# Altium PCB pechatka.PcbDoc
Units mm, origin at the board's own origin, x right, y up, seen from the top; angles counter-clockwise.
Board outline 95 x 95 mm, 2 copper layers (Top Layer, Bottom Layer); 116 components, 77 nets, 390 pads, 0 vias.
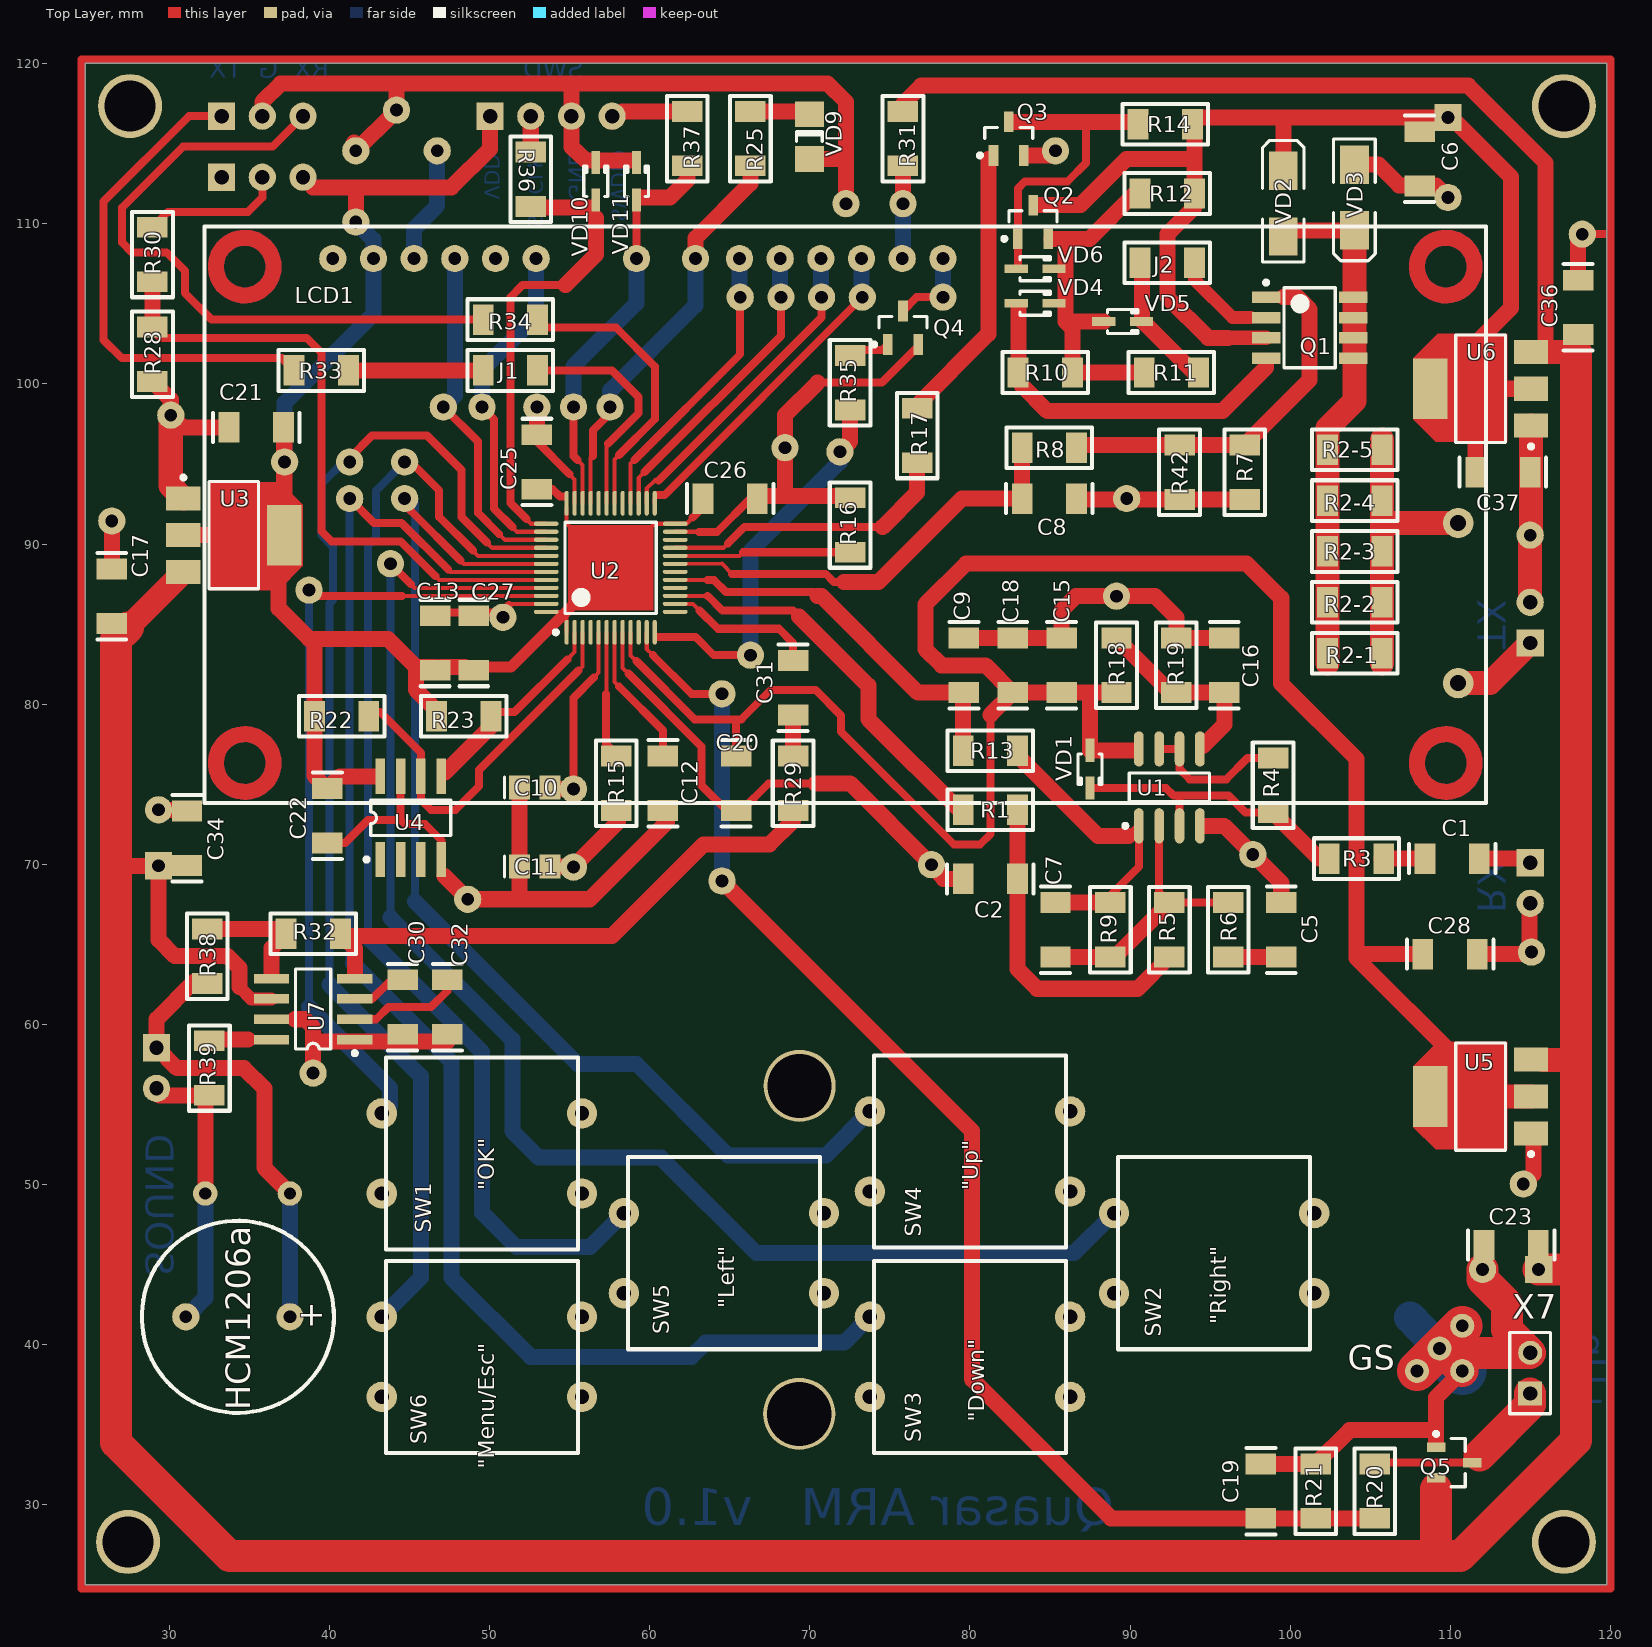
[diagram p0: Top Layer view]
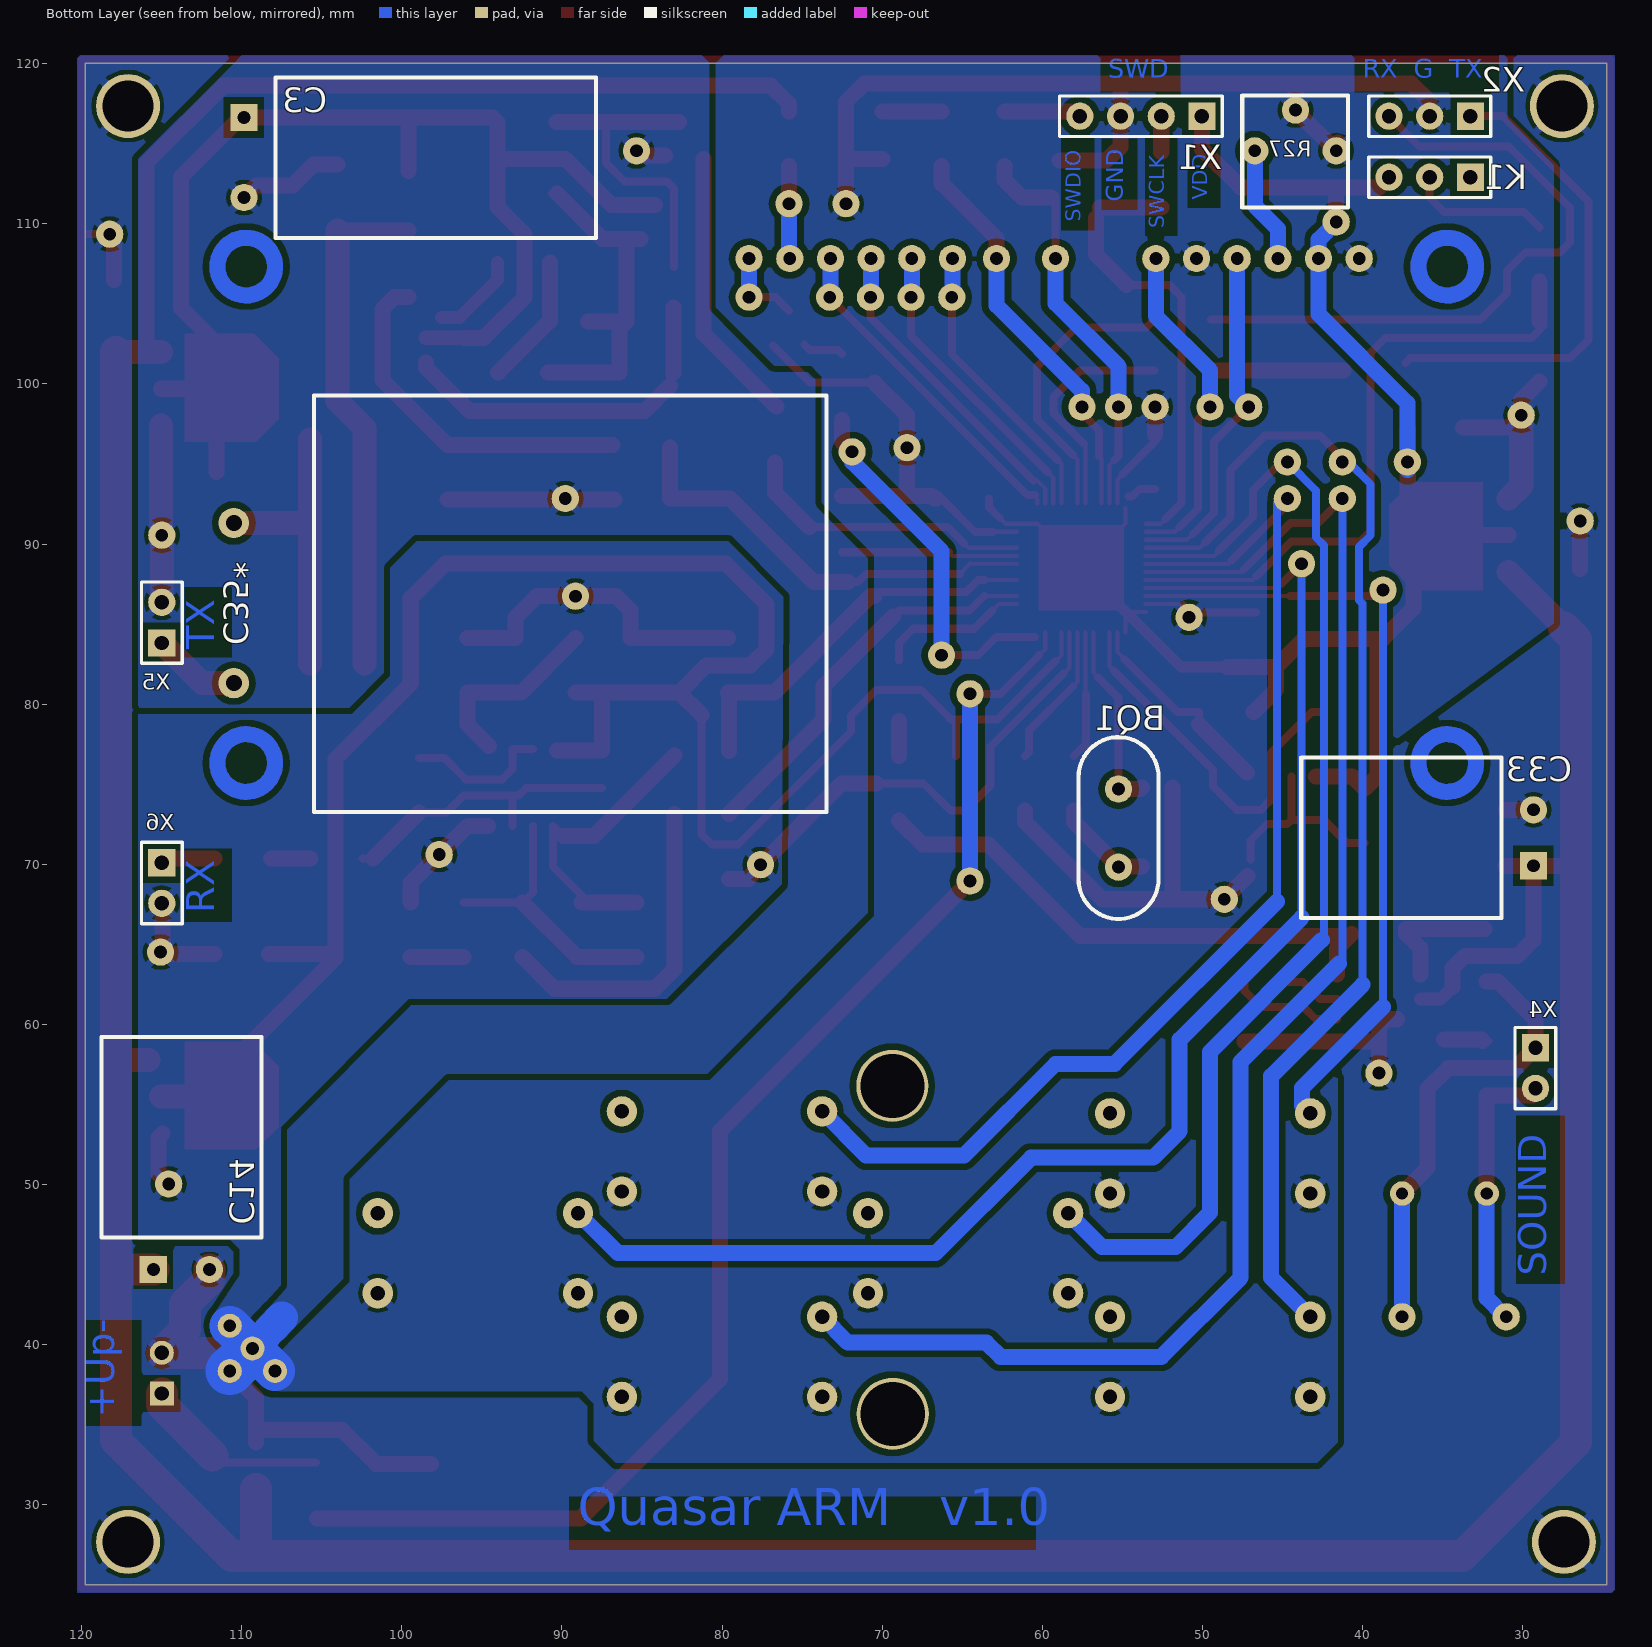
[diagram p1: Bottom Layer view, seen from below]

## Layer stack, top to bottom
Top Solder: solder mask 0.0102, Solder Resist, Dk 3.5
Top Layer: signal copper 0.0356
Dielectric 1: dielectric 0.32, FR-4, Dk 4.8
Bottom Layer: signal copper 0.0356
Bottom Solder: solder mask 0.0102, Solder Resist, Dk 3.5

## Board outline
24.765,25.019 119.765,25.019 119.765,120.019 24.765,120.019

## Design rules (kind name [scope] priority, off if disabled: settings)
Clearance Clearance_TEXT [InPolygon vs IsTextInverted] p1: gap=0
Clearance [All] p2: gap=0.4
PlaneConnect [All] p1: planeconnectstyle=Relief reliefexpansion=0.508 reliefentries=4 reliefconductorwidth=0.5 reliefairgap=0.254
PolygonConnect [All] p1: connectstyle=Relief reliefconductorwidth=0.5 reliefentries=4 polygonreliefangle="45 Angle" airgapwidth=0.254
RoomDefinition Keyboard_on_board [InComponentClass('Keyboard_on_board')] p1: confinementstyle=ConfineIn formatcopy=TRUE lockcomponents=FALSE outline 41.908,32.004 103.378,32.004 103.378,59.182 41.908,59.182
RoomDefinition Transmitter [InComponentClass('Transmitter')] p2: confinementstyle=ConfineIn formatcopy=TRUE lockcomponents=FALSE outline 61.214,119.761 61.214,65.532 116.586,65.532 116.586,119.761
RoomDefinition SoundBlock [InComponentClass('SoundBlock')] p3: confinementstyle=ConfineIn formatcopy=TRUE lockcomponents=FALSE outline 72.263,53.848 72.263,84.074 27.305,84.074 27.305,53.848
RoomDefinition ReceiverBlock [InComponentClass('ReceiverBlock')] p4: confinementstyle=ConfineIn formatcopy=TRUE lockcomponents=FALSE outline 69.596,53.467 119.761,53.467 119.761,91.44 69.596,91.44
RoomDefinition "Power block" [InComponentClass('Power block')] p5: confinementstyle=ConfineIn formatcopy=TRUE lockcomponents=FALSE outline 24.917,25.146 119.634,25.146 119.634,119.888 24.917,119.888
RoomDefinition "Microcontroller block" [InComponentClass('Microcontroller block')] p6: confinementstyle=ConfineIn formatcopy=TRUE lockcomponents=FALSE outline 25.4,25.273 119.507,25.273 119.507,119.38 25.4,119.38
RoutingVias [All] p1: holewidth=0.8 width=1.4 viastyle="Through Hole" minholewidth=0.8 minwidth=1.4 maxholewidth=0.8 maxwidth=1.4
SolderMaskExpansion [All] p1: expansion=0.102
Width Net_UP [InNetClass('UP')] p1: maxlimit=1.5 minlimit=0.5 preferedwidth=1.5
Width Net_5V [InNetClass('5V')] p2: maxlimit=1.5 minlimit=0.5 preferedwidth=1
Width Net_VDD [InNetClass('VDD')] p3: maxlimit=1.5 minlimit=0.5 preferedwidth=1
Width Net_VDDA [InNetClass('VDDA')] p4: maxlimit=1 minlimit=0.5 preferedwidth=1
Width [All] p5: maxlimit=3 minlimit=0.254 preferedwidth=0.5
29 further rules are at their usual default settings.

## Classes and differential pairs
component class Keyboard_on_board: SW1 SW2 SW3 SW4 SW5 SW6
component class ReceiverBlock: C1 C2 C5 C7 C9 C15 C16 R1 R3 R4 R5 R6 R9 R13 R18 R19 U1 VD1 X6
component class Transmitter: C3 C6 C8 C35* Q1 Q2 Q3 R2-1 R2-2 R2-3 R2-4 R2-5 R7 R8 R10 R11 R12 R14 R17 R42 VD2 VD3 VD4 VD5 VD6 X5
component class SoundBlock: C30 C31 C32 C33 C34 R29 R32 R38 R39 U7 X4
component class "Microcontroller block": BQ1 C10 C11 C12 C13 K1 LCD1 Q4 R15 R16 R22 R23 R25 R27 R28 R30 R31 R33 R34 R35 R36 R37 U2 U4 VD9 VD10 VD11 X1 X2
component class "Power block": C14 C17 C18 C19 C20 C21 C22 C23 C25 C26 C27 C28 C36 C37 GS Q5 R20 R21 U3 U5 U6 X7

## Components (designator, comment, footprint, x,y, rotation, side; value= is the part's Value field where it differs from the comment)
BQ1 "8,0 MHz" "HC-49/U3H (low profile)" 55.245,72.263 r90 bottom
C1 "0.1uF" 1206_SMD_CAPACITOR 110.109,70.358 r180 top
C2 "4700" 1206_SMD_CAPACITOR 81.28,69.088 r0 top
C3 "1000.0uF" Capacitor-10X20-LYINGR 109.855,111.633 r270 bottom
C5 "0.033" 1206_SMD_CAPACITOR 99.441,65.913 r90 top
C6 "0.1uF" 1206_SMD_CAPACITOR 108.077,114.046 r270 top
C7 "22pF" 1206_SMD_CAPACITOR 85.344,65.913 r270 top
C8 "4.7uF" 1206_SMD_CAPACITOR 84.963,92.837 r180 top
C9 "4700" 1206_SMD_CAPACITOR 79.629,82.423 r270 top
C10 "22pF" 0805 52.832,74.803 r0 top
C11 "22pF" 0805 52.832,69.85 r0 top
C12 "0.1uF" 1206_SMD_CAPACITOR 60.833,75.057 r90 top
C13 "0.1uF" 1206_SMD_CAPACITOR 46.609,83.82 r270 top
C14 "470.0uF" Capacitor-10x12.5-lyingR 112.014,44.704 r180 bottom
C15 "1.0uF" 1206_SMD_CAPACITOR 85.725,82.423 r90 top
C16 "10uF" 1206_SMD_CAPACITOR 95.885,82.423 r270 top
C17 "0.1uF" 1206_SMD_CAPACITOR 26.416,86.741 r270 top
C18 "0.1uF" 1206_SMD_CAPACITOR 82.677,82.423 r270 top
C19 "0.1uF" 1206_SMD_CAPACITOR 98.171,30.861 r270 top
C20 "0.1uF" 1206_SMD_CAPACITOR 65.405,75.057 r90 top
C21 "10uF" 1206_SMD_CAPACITOR 35.433,97.282 r0 top
C22 "0.1uF" 1206_SMD_CAPACITOR 39.878,73.025 r90 top
C23 "0.1uF" 1206_SMD_CAPACITOR 113.792,46.228 r0 top
C25 "0.1uF" 1206_SMD_CAPACITOR 52.959,95.123 r270 top
C26 "0.1uF" 1206_SMD_CAPACITOR 65.024,92.837 r180 top
C27 "10uF" 1206_SMD_CAPACITOR 49.022,83.82 r270 top
C28 "10uF" 1206_SMD_CAPACITOR 109.982,64.389 r180 top
C30 "1uF" 1206_SMD_CAPACITOR 44.577,61.087 r90 top
C31 "10uF" 1206_SMD_CAPACITOR 68.961,81.026 r270 top
C32 "4.7uF" 1206_SMD_CAPACITOR 47.371,61.087 r90 top
C33 "470.0uF" Capacitor-10x12.5-lying 29.337,73.406 r270 bottom
C34 "0.1uF" 1206_SMD_CAPACITOR 31.115,71.628 r90 top
C35* "0.5uF" K71-7-LYING 110.49,91.313 r270 bottom
C36 "0.1uF" 1206_SMD_CAPACITOR 117.983,104.775 r270 top
C37 "10uF" 1206_SMD_CAPACITOR 113.284,94.488 r180 top
GS "Ground setter" GND_POINT 110.744,38.354 r135 top net-tie
HCM1206a "Comment" HCM 34.29,41.743 r180 top
J1 "Comment" 1206_SMD_JUMPER 51.308,100.838 r180 top
J2 "Comment" 1206_SMD_JUMPER 92.329,107.569 r180 top
K1 "Header 3" HDR1X3 33.274,112.903 r0 bottom
LCD1 "WH1602B" WS1602B-3 40.215,107.823 r0 top locked
Q1 "IRF7105" SO-2 101.219,103.505 r0 top
Q2 "BC846B" SOT23_N 83.947,110.109 r90 top
Q3 "BC846B" SOT23_N 82.423,115.316 r90 top
Q4 "BC846B" SOT23_N 75.819,103.505 r90 top
Q5 "IRLML6401" Micro3_N 110.236,32.639 r0 top
R1 "2K" 1206_SMD_Resistor 81.28,73.406 r0 top
R2-1 "51" 1206_SMD_Resistor 104.031,83.185 r180 top
R2-2 "51" 1206_SMD_Resistor 104.031,86.36 r180 top
R2-3 "51" 1206_SMD_Resistor 104.031,89.535 r180 top
R2-4 "51" 1206_SMD_Resistor 104.031,92.71 r180 top
R2-5 "47" 1206_SMD_Resistor 104.031,95.885 r180 top
R3 "100" 1206_SMD_Resistor 104.14,70.358 r0 top
R4 "2K0" 1206_SMD_Resistor 98.933,74.93 r90 top
R5 "100K" 1206_SMD_Resistor 92.456,65.913 r90 top
R6 "1K2" 1206_SMD_Resistor 96.139,65.913 r270 top
R7 "1R" 1206_SMD_Resistor 97.155,94.488 r270 top
R8 "10K" 1206_SMD_Resistor 84.963,96.012 r0 top
R9 "100K" 1206_SMD_Resistor 88.773,65.913 r90 top
R10 "1K" 1206_SMD_Resistor 84.709,100.711 r180 top
R11 "1K" 1206_SMD_Resistor 92.583,100.711 r0 top
R12 "100K" 1206_SMD_Resistor 92.329,111.887 r0 top
R13 "2K" 1206_SMD_Resistor 81.28,77.089 r180 top
R14 "10K" 1206_SMD_Resistor 92.202,116.205 r0 top
R15 "390" 1206_SMD_Resistor 57.912,75.057 r90 top
R16 "10K" 1206_SMD_Resistor 72.517,91.186 r90 top
R17 "1K" 1206_SMD_Resistor 76.708,96.774 r270 top
R18 "10K" 1206_SMD_Resistor 89.154,82.423 r270 top
R19 "10K" 1206_SMD_Resistor 92.886,82.423 r270 top
R20 "390" 1206_SMD_Resistor 105.283,30.861 r270 top
R21 "390" 1206_SMD_Resistor 101.6,30.861 r270 top
R22 "4K7" 1206_SMD_Resistor 40.767,79.248 r0 top
R23 "4K7" 1206_SMD_Resistor 48.387,79.248 r180 top
R25 "1K" 1206_SMD_Resistor 66.294,115.316 r270 top
R27 "10K" 3362P 41.656,114.554 r0 bottom
R28 "10K" 1206_SMD_Resistor 28.956,101.854 r90 top
R29 "1K" 1206_SMD_Resistor 68.961,75.057 r270 top
R30 "1K" 1206_SMD_Resistor 28.956,108.077 r270 top
R31 "200" 1206_SMD_Resistor 75.819,115.316 r270 top (schematic designator R31,R43)
R32 "3K" 1206_SMD_Resistor 38.989,65.659 r180 top
R33 "100" 1206_SMD_Resistor 39.497,100.838 r180 top
R34 "100" 1206_SMD_Resistor 51.308,104.013 r180 top
R35 "1K" 1206_SMD_Resistor 72.517,100.076 r90 top
R36 "100" 1206_SMD_Resistor 52.578,112.776 r90 top
R37 "100" 1206_SMD_Resistor 62.357,115.316 r90 top
R38 "2R" 1206_SMD_Resistor 32.385,64.262 r270 top
R39 "2R" 1206_SMD_Resistor 32.512,57.277 r270 top
R42 "1R" 1206_SMD_Resistor 93.091,94.488 r270 top
SW1 "\"OK\"" KAN1211 49.528,51.943 r90 top
SW2 "\"Right\"" KAN1211 95.248,45.72 r90 top
SW3 "\"Down\"" KAN1211 80.008,39.243 r90 top
SW4 "\"Up\"" KAN1211 80.008,52.07 r90 top
SW5 "\"Left\"" KAN1211 64.641,45.72 r90 top
SW6 "\"Menu/Esc\"" KAN1211 49.528,39.243 r90 top
U1 "MCP6022" SOIC-SN8_N 92.456,74.803 r90 top
U2 "STM32F100C8T6" LQFP48_L 57.57,88.515 r90 top
U3 "NCP1117ST33T3G" SOT-223 34.036,90.551 r0 top
U4 "M24C16WMN6" SO8 45.085,72.898 r0 top
U5 "NCP1117ST33T3G" SOT-223 111.887,55.499 r180 top
U6 "NCP1117ST50T3G" SOT-223 111.887,99.695 r180 top
U7 "MC34119D" so8 38.989,60.96 r90 top
VD1 "1N4148" SOD-323 87.503,75.946 r270 top
VD2 "SS16" SMA 99.568,111.252 r90 top
VD3 "SS16" SMA 104.013,111.633 r270 top
VD4 "1N4148" SOD-323 84.074,105.029 r0 top
VD5 "1N4148" SOD-323 89.535,103.886 r0 top
VD6 "1N4148" SOD-323 84.074,107.188 r0 top
VD9 "LED0" 1206 69.977,115.443 r270 top
VD10 "BZX384-C5V1" SOD323 56.642,112.649 r90 top
VD11 "BZX384-C5V1" SOD323 59.182,112.649 r90 top
X1 "SWD" HDR1X4 50.038,116.713 r0 bottom
X2 "USART" HDR1X3 33.274,116.713 r0 bottom
X4 "SOUND" HDR1X2#1 29.21,58.547 r270 bottom
X5 "TX_COIL" HDR1X2#1 114.984,83.82 r90 bottom
X6 "RX_COIL" HDR1X2#1 114.984,70.104 r270 bottom
X7 "POWER" HDR1X2#2 114.984,36.957 r90 top

## Footprints (in the part's own frame and the unit in brackets; to place one, negate y for a bottom-side part, rotate by r counter-clockwise, add the part's x,y. Pads: shape width x height; smd on the part's side, far side on the other; paste and mask are expansions set on the pad)
0805 [mm]
  rect 1.3x1.5 smd: 1(-0.95,0) 2(0.95,0)
  silkscreen extent -1.9,-0.65 -1.9,0.65
1206 [mm]
  rect 1.6x1.8 smd: 1(-1.4,0) 2(1.4,0)
  silkscreen extent -0.3,-0.8 0.3,0.8
1206_SMD_CAPACITOR [mm]
  rect 1.3x1.9 smd: 1(-1.7,0) 2(1.7,0)
  silkscreen extent -2.7,-0.9 2.7,0.9
1206_SMD_JUMPER [mm]
  rect 1.3x1.9 smd: 1(-1.7,0) 1(1.7,0)
  silkscreen extent -2.67,-1.27 2.67,1.27
1206_SMD_Resistor [mm]
  rect 1.3x1.9 smd: 1(-1.7,0) 2(1.7,0)
  silkscreen extent -2.67,-1.27 2.67,1.27
3362P [mm] "3362 - 1/4 ” Square Trimming Potentiometer"
  round 1.7 hole 0.8: 1(0,0) 2(2.54,-2.54) 3(5.08,0)
  silkscreen extent -0.74,-3.46 5.86,3.53
Capacitor-10x12.5-lying [mm]
  rect 1.7x1.7 hole 0.8: 1(3.5,0)
  round 1.7 hole 0.8: 2(0,0)
  silkscreen extent -3.25,-14.5 6.75,-2
Capacitor-10x12.5-lyingR [mm]
  rect 1.7x1.7 hole 0.8: 1(-3.5,0)
  round 1.7 hole 0.8: 2(0,0)
  silkscreen extent -6.75,2 3.25,14.5
Capacitor-10X20-LYINGR [mm]
  rect 1.7x1.7 hole 0.8: 1(-5,0)
  round 1.7 hole 0.8: 2(0,0)
  silkscreen extent -7.49,1.97 2.51,21.97
GND_POINT [mm]
  round 1.5 hole 0.8: 1(0,0) 2(2,2) 3(2,0) 4(2,-2)
  Top Layer lines w2: 2,0 0,0
  Top Layer lines w2.5: 2,2 2,0 2,-2
  Bottom Layer lines w2.5: 2,2 2,0 2,-2
  Bottom Layer lines w3: 1.078,0 0,0
"HC-49/U3H (low profile)" [mm] "QUARTZ CRYSTALS HC-49/U3H (low profile)"
  round 1.7 hole 0.8: 1(-2.44,0) 2(2.44,0)
  silkscreen extent -5.67,-2.5 5.67,2.5
HCM [mm]
  round 1.7 hole 0.8: 1(-3.25,0) 2(3.25,0)
  silkscreen extent -6,-6 6,6
HDR1X2#1 [mm] "Connector; Header; 2 Position"
  rect 1.7x1.7 hole 0.9: 1(0,0)
  round 1.7 hole 0.9: 2(2.54,0)
  silkscreen extent -1.27,-1.27 3.81,1.27
HDR1X2#2 [mm] "Connector; Header; 2 Position"
  rect 1.5x1.5 hole 0.9: 1(0,0)
  round 1.5 hole 0.9: 2(2.54,0)
  silkscreen extent -1.27,-1.27 3.81,1.27
HDR1X3 [mm] "Connector; Header; 3 Position"
  rect 1.7x1.7 hole 0.9: 1(0,0)
  round 1.7 hole 0.9: 2(2.54,0) 3(5.08,0)
  silkscreen extent -1.27,-1.27 6.35,1.27
HDR1X4 [mm] "Connector; Header; 4 Position"
  rect 1.7x1.7 hole 0.9: 1(0,0)
  round 1.7 hole 0.9: 2(2.54,0) 3(5.08,0) 4(7.62,0)
  silkscreen extent -1.27,-1.27 8.89,1.27
K71-7-LYING [mm]
  round 1.9 hole 1: 1(0,0) 2(10,0)
  silkscreen extent -7.95,5 18.05,37
KAN1211 [mm]
  round 1.9 hole 0.9: 1(2.5,6.25) 1(2.5,-6.25) 2(-2.5,6.25) 2(-2.5,-6.25)
  silkscreen extent -6,-6 6,6, body extent -6,-6 6,6, height 4
LQFP48_L [mm] "Thin QFP, 48-Leads, Body 7x7mm, Pitch 0.5mm, IPC High Density"
  oval 1.55x0.254 smd: 1(-4.025,2.75) 2(-4.025,2.25) 3(-4.025,1.75) 4(-4.025,1.25) 5(-4.025,0.75) 6(-4.025,0.25) 7(-4.025,-0.25) 8(-4.025,-0.75) 9(-4.025,-1.25) 10(-4.025,-1.75) 11(-4.025,-2.25) 12(-4.025,-2.75) 25(4.025,-2.75) 26(4.025,-2.25) 27(4.025,-1.75) 28(4.025,-1.25) 30(4.025,-0.25) 31(4.025,0.25) 33(4.025,1.25) 34(4.025,1.75) 35(4.025,2.25) 36(4.025,2.75)
  oval 0.254x1.55 smd: 13(-2.75,-4.025) 14(-2.25,-4.025) 15(-1.75,-4.025) 16(-1.25,-4.025) 17(-0.75,-4.025) 19(0.25,-4.025) 20(0.75,-4.025) 21(1.25,-4.025) 23(2.25,-4.025) 24(2.75,-4.025) 37(2.75,4.025) 38(2.25,4.025) 39(1.75,4.025) 40(1.25,4.025) 41(0.75,4.025) 42(0.25,4.025) 43(-0.25,4.025) 44(-0.75,4.025) 45(-1.25,4.025) 46(-1.75,4.025) 47(-2.25,4.025) 48(-2.75,4.025)
  oval 0.25x1.55 smd: 18(-0.25,-4.025) 22(1.75,-4.025)
  oval 1.55x0.25 smd: 29(4.025,-0.75) 32(4.025,0.75)
  silkscreen extent -4.15,-2.85 2.85,3.55, body extent -3.5,-3.5 3.5,3.5, height 1.6
Micro3_N [mm] "SOT23, 3-Leads, Body 2.9x1.3mm, Pitch 0.95mm, Lead Span 2.3mm, IPC Medium Density"
  rect 1.15x0.6 smd: 1(-1.125,0.95) 2(-1.125,-0.95) 3(1.125,0)
  silkscreen extent -1.25,-1.5 0.7,1.92, body extent -0.7,-1.5 0.7,1.5, height 1.12
SMA [mm]
  rect 2.4x1.8 smd: 1(-2.05,0) 2(2.05,0)
  silkscreen extent -3.65,-1.3 3.95,1.3
SO8 [mm] "Small Outline; 8 Leads; Body Width 3.9 mm; Pitch 1.27 mm"
  rect 0.6x2.2 smd: 1(-1.905,-2.6) 2(-0.635,-2.6) 3(0.635,-2.6) 4(1.905,-2.6) 5(1.905,2.6) 6(0.635,2.6) 7(-0.635,2.6) 8(-1.905,2.6)
  silkscreen extent -2.88,-2.72 2.5,1.1
so8 [mm] "Small Outline; 8 Leads; Body Width 3.9 mm; Pitch 1.27 mm"
  rect 0.6x2.2 smd: 1(-1.905,-2.6) 2(-0.635,-2.6) 3(0.635,-2.6) 4(1.905,-2.6) 5(1.905,2.6) 6(0.635,2.6) 7(-0.635,2.6) 8(-1.905,2.6)
  silkscreen extent -2.88,-2.72 2.5,1.1
SO-2 [mm] "SOIC, 8-Leads, Body 4,90x3,90mm, Pitch 1,27mm, IPC Medium Density"
  rect 1.78x0.72 smd: 1(-2.725,1.905) 2(-2.725,0.635) 3(-2.725,-0.635) 4(-2.725,-1.905) 5(2.725,-1.905) 6(2.725,-0.635) 7(2.725,0.635) 8(2.725,1.905)
  silkscreen extent -2.85,-2.5 1.6,2.94, body extent -2,-2.5 2,2.5, height 1.75
SOD323 [mm] "SOD-323/SC-76; 2 Leads; Body 1.7 x 1.3 mm, (LxW)"
  rect 1.45x0.55 smd: 1(1.175,0) 2(-1.175,0)
  silkscreen extent -0.95,-0.75 0.95,0.75
SOD-323 [mm]
  rect 1.45x0.55 smd: 1(1.175,0) 2(-1.175,0)
  silkscreen extent -0.95,-0.75 0.95,0.75
SOIC-SN8_N [mm] "SOIC, 8-Leads, Body 4.9x3.8mm, Pitch 1.27mm, IPC Medium Density"
  oval 2.2x0.6 smd: 1(-2.4,1.905) 2(-2.4,0.635) 3(-2.4,-0.635) 4(-2.4,-1.905) 5(2.4,-1.905) 6(2.4,-0.635) 7(2.4,0.635) 8(2.4,1.905)
  silkscreen extent -2.52,-2.5 0.9,2.88, body extent -2,-2.5 2,2.5, height 1.75
SOT23_N [mm] "SOT23, 3-Leads, Body 2.9x1.3mm, Pitch 0.95mm, Lead Span 2.3mm, IPC Medium Density"
  rect 1.3x0.6 smd: 1(-1.05,0.95) 2(-1.05,-0.95) 3(1.05,0)
  silkscreen extent -1.17,-1.5 0.7,1.92, body extent -0.7,-1.5 0.7,1.5, height 1.1
SOT-223 [mm] "SOT223, 4-Leads, Body 6,50x7,00mm (avg), Pitch 2,30mm, IPC Medium Density"
  rect 2.15x1.5 smd: 1(-3.15,2.3) 2(-3.15,0) 3(-3.15,-2.3)
  rect 2.15x3.8 smd: 4(3.15,0)
  silkscreen extent -3.27,-3.35 1.55,3.72, body extent -1.85,-3.35 1.85,3.35, height 1.8
WS1602B-3 [mm]
  round 1.7 hole 0.8: 1(0,0) 2(2.54,0) 3(5.08,0) 4(7.62,0) 5(10.16,0) 6(12.7,0) 11(25.4,0) 12(27.94,0) 13(30.48,0) 14(33.02,0) 15(35.56,0) 16(38.1,0)
  Top Layer circle w1: c-5.5,-0.5 r1.8
  Top Layer circle w1: c-5.5,-31.5 r1.8
  Top Layer circle w1: c69.5,-31.5 r1.8
  Top Layer circle w1: c69.5,-0.5 r1.8
  Bottom Layer circle w1: c69.5,-0.5 r1.8
  Bottom Layer circle w1: c69.5,-31.5 r1.8
  Bottom Layer circle w1: c-5.5,-31.5 r1.8
  Bottom Layer circle w1: c-5.5,-0.5 r1.8
  silkscreen extent -8,-34 72,2, body extent -7.9,-33.99 72.1,2.01, height 20

## Part data
BQ1: library part XTAL, "Crystal Oscillator"
C1 C2 C5 C6 C7 C8 C9 C10 C11 C12 C13 C15 C16 C17 C18 C19 C20 C21 C22 C23 C25 C26 C27 C28 C30 C31 C32 C34 C36 C37: library part "Capacitor SMD", "Capacitor"
C3 C14 C33: library part "Cap Pol1", "Polarized Capacitor (Radial)"
C35*: library part "Capacitor K71-7", "Capacitor"
K1: "Header, 3-Pin"
LCD1: "Символьный ЖКИ разрешением 16 символов на 2 строки"
Q2 Q3 Q4: "NPN General-purpose Transistor"
Q5: "HEXFET Power MOSFET"
R1 R2-1 R2-2 R2-3 R2-4 R2-5 R3 R4 R5 R6 R7 R8 R9 R10 R11 R12 R13 R14 R15 R16 R17 R18 R19 R20 R21 R22 R23 R25 R28 R29 R30 R31 R32 R33 R34 R35 R36 R37 R38 R39 R42: library part Resistor, "Resistor"
R27: library part "Trimming Potentiometer", "Square Trimming Potentiometer"
SW1 SW2 SW3 SW4 SW5 SW6: library part BUTTON_KAN1211, "Single-Pole, Single-Throw Switch"
U1: library part MCP6022-I/SN, "Rail-to-Rail Input/Output, 10 MHz Operational Amplifier, 8-Pin SOIC, Industrial Temperature"
U2: library part STM32F101C8T6, "STM32 ARM-based 32-bit MCU with 64 Kbytes Flash, 48-pin LQFP, Industrial Temperature"
U3 U5: library part NCP1117ST33, "LDO стабилизатор 3.3 V, 1 A, падение 1.2 V, Uвх до 20 V, 0..+125°C, 1%"
U4: "16Kbit Serial IІC Bus EEPROM"
U6: library part NCP1117ST50, "LDO стабилизатор 5.0 V, 1 A, падение 1.2 V, Uвх до 20 V, 0..+125°C, 1%"
U7: "Low-Power Audio Amplifier"
VD1 VD4 VD5 VD6: "High Conductance Fast Diode"
VD2 VD3: library part Diode, "Default Diode"
VD9: "Typical INFRARED GaAs LED"
VD10 VD11: library part BZX84-C5V1, "Voltage Regulator Diode"
X1: library part "Header 4", "Header, 4-Pin"
X2: library part "Header 3", "Header, 3-Pin"
X4 X5 X6 X7: library part "Header 2", "Header, 2-Pin"

## Free pads (board coordinates)
  round 1.7 hole 0.8: 0(48.641,67.818) 0(71.882,95.758) 0(77.597,69.977) 0(89.154,86.741) 0(89.789,92.837) 1(55.245,98.552) 1(64.516,80.645) 1(66.294,83.058) 1(85.344,114.554) 1(97.663,70.612) 1(118.237,109.347) 2(30.099,98.044) 2(38.989,56.959) 2(57.531,98.552) 2(64.516,68.961) 2(114.984,90.551) 2(115.062,64.516) 3(59.182,107.823) 3(114.554,50.038) 4(62.865,107.823) 5(26.416,91.44) 7(37.211,95.123) 7(75.819,111.252) 8(52.959,98.552) 8(73.279,105.41) 9(68.453,96.012) 9(70.739,105.41) 10(68.199,105.41) 11(65.659,105.41) ""(38.735,87.122) ""(41.275,92.837) ""(41.275,95.123) ""(41.656,110.109) ""(43.815,88.773) ""(44.704,92.837) ""(44.704,95.123) ""(47.117,98.552) ""(49.53,98.552) ""(50.839,85.423) ""(72.263,111.252) ""(78.315,105.41)
  round 1.524 hole 0.762: 2(32.255,49.443) 3(37.54,49.443)
  round 4 hole 3.2 unplated: ""(27.432,27.686) ""(27.559,117.348) ""(117.094,27.686) ""(117.094,117.348)
  round 4.5 hole 4: ""(69.342,35.687) ""(69.369,56.167)

## Nets (pads, with @x,y where several pads share a name; then routed paths per layer and width w, separated by ;. In a path a pad name is that pad's centre, name@x,y a point inside that pad or via, vN(x,y) a via of type N, cw(c..) or ccw(c..) an arc to the next point about the centre after c; other vN are vias at no path point)
+5V: C3.1 C6.1 C37.2 Q1.3 Q2.3 R12.2 R14.2 U6.2 U6.4 VD2.2 | length 82.8
  Top Layer w0.9: 96.107,102.87 Q1.3
  Top Layer w1: Q2.3@84.201,111.159 86.902,111.159 89.789,114.046 94.029,114.046 ; 96.107,102.87 94.869,102.87 92.329,105.41 92.329,109.347 94.029,111.047 R12.2 94.029,114.046 ; VD2.2 99.568,116.633 ; C3.1@109.808,116.887 113.792,112.903 113.792,104.75 U6.4 ; C3.1 99.568,116.633 ; C37.2 111.584,96.848 U6.4 ; U6.2 U6.4 ; 94.029,114.046 94.029,116.332 94.33,116.633 99.568,116.633
+BATT: Q5.3 R20.1 X7.1 | length 11.2
  Top Layer w0.5: R20.1@105.361,32.639 Q5.3
  Top Layer w2: 111.814,33.093 114.984,36.262 X7.1
+UP: C14.1 C17.2 C23.2 C33.1 C34.1 C36.2 Q5.2 R31.1 U3.3 U5.3 U6.3 U7.6 | length 306.1
  Top Layer w0.8: 34.389,62.334 35.128,61.595 U7.6
  Top Layer w1: 26.416,69.906 C33.1 ; C34.1@31.093,69.906 C33.1 ; 34.389,62.334 34.389,63.528 33.655,64.262 30.353,64.262 29.337,65.278 C33.1 ; R31.1 75.819,117.475 76.962,118.618 111.125,118.618 115.951,113.792 U6.3@115.951,101.995
  Top Layer w1.5: 27.422,84.787 U3.3 ; U6.3@115.037,101.981 117.856,101.981 ; U5.3@115.813,57.785 117.983,57.785
  Top Layer w2: 27.422,84.787 26.67,84.035 26.67,33.909 33.782,26.797 109.111,26.797 ; 109.111,30.988 109.111,26.797 ; C14.1 117.856,44.704 ; 117.856,101.981 117.856,34.036 110.617,26.797 109.111,26.797
BTN0: pad.@38.735,87.122 SW1.1 U2.46 | length 49.9
  Top Layer w0.254: 44.553,86.765 U2.46
  Top Layer w0.5: pad.@38.735,87.122 39.093,86.764 44.552,86.764
  Bottom Layer w0.5: 38.735,61.087 pad.@38.735,87.122
  Bottom Layer w1: 38.735,61.087 43.786,56.036 43.786,54.951 SW1.1@43.278,54.443
BTN1: pad.@43.815,88.773 SW2.1 U2.45 | length 90.7
  Top Layer w0.254: 45.085,87.503 45.323,87.265 U2.45
  Top Layer w0.5: pad.@43.815,88.773 45.085,87.503
  Bottom Layer w0.5: 43.815,66.675 pad.@43.815,88.773
  Bottom Layer w1: 43.815,66.675 51.435,59.055 51.435,53.34 53.086,51.689 60.706,51.689 66.675,45.72 86.498,45.72 SW2.1@88.998,48.22
BTN2: pad.@41.275,92.837 SW3.1 U2.43 | length 94.1
  Top Layer w0.254: 47.403,88.424 47.547,88.281 ; 47.547,88.265 U2.43
  Top Layer w0.5: pad.@41.275,92.837 42.799,91.313 44.515,91.313 47.403,88.424
  Bottom Layer w0.5: 41.275,64.008 pad.@41.275,92.583
  Bottom Layer w1: 41.473,63.81 47.625,57.658 47.625,44.196 52.578,39.243 62.611,39.243 63.5,40.132 72.147,40.132 SW3.1@73.758,41.743
BTN3: pad.@44.704,92.837 SW4.1 U2.42 | length 72.4
  Top Layer w0.254: 48.197,88.963 48.395,88.765 U2.42
  Top Layer w0.5: pad.@44.704,92.837 45.085,92.075 48.197,88.963
  Bottom Layer w0.5: pad.@44.704,92.837 45.081,92.837 45.339,92.579 45.339,67.691
  Bottom Layer w1: 45.339,67.691 55.499,57.531 59.182,57.531 64.897,51.816 71.004,51.816 SW4.1@73.758,54.57
BTN4: pad.@44.704,95.123 SW5.1 U2.41 | length 73.9
  Top Layer w0.254: 48.966,89.591 49.292,89.265 U2.41
  Top Layer w0.5: pad.@44.704,95.123 45.085,95.123 46.863,93.345 46.863,91.694 48.966,89.591
  Bottom Layer w0.5: 42.418,65.532 42.418,89.916 42.926,90.424 42.926,93.345 44.704,95.123 pad.@44.167,95.016
  Bottom Layer w1: 42.545,65.278 49.53,58.293 49.53,48.26 51.689,46.101 56.272,46.101 SW5.1@58.391,48.22
BTN5: pad.@41.275,95.123 SW6.1 U2.40 | length 75.8
  Top Layer w0.254: 49.84,90.099 50.173,89.765 U2.40
  Top Layer w0.5: pad.@41.275,95.123 41.275,95.377 42.672,96.774 46.101,96.774 48.26,94.615 48.26,91.678 49.84,90.099
  Bottom Layer w0.5: 40.005,62.484 40.005,86.271 40.235,86.501 40.235,89.813 39.497,90.551 39.497,93.726 40.894,95.123 pad.@41.275,95.123
  Bottom Layer w1: 40.005,62.484 45.72,56.769 45.72,44.185 SW6.1@43.278,41.743
GND: C14.2 C17.1 C19.1 C23.1 C30.1 C32.1 C33.2 C34.2 C36.1 GS.1 pad.1@118.237,109.347 pad.2@38.989,56.959 pad.5 pad.@27.432,27.686 pad.@27.559,117.348 pad.@117.094,27.686 pad.@117.094,117.348 Q5.1 R21.1 U7.1 U7.7 X7.2 | length 431.9
  Top Layer w0.254: pad.1@117.983,109.093 pad.1@118.237,109.347
  Top Layer w0.5: pad.1@118.237,109.347 120.015,109.347 ; 120.015,109.347 120.015,120.269 24.511,120.269 24.511,24.765 120.015,24.765 120.015,109.347
  Top Layer w1: C17.1 pad.5 ; C33.2 C34.2@31.037,73.406 ; 37.846,60.325 38.481,60.325 38.989,59.817 38.989,59.182 39.243,58.928 C32.1@47.371,58.928 ; pad.2@38.989,56.959 38.989,58.928 ; C19.1 R21.1 103.71,34.671 108.984,34.671 ; 109.111,33.909 109.111,36.721 111.887,39.497 ; C36.1 pad.1@117.983,109.093
  Top Layer w2: 111.887,39.497 X7.2 113.538,40.943 113.538,42.545 112.014,44.069 C14.2
GND_5V: C3.2 C6.2 C8.1 C37.1 GS.3 pad.0@89.789,92.837 pad.1@85.344,114.554 pad.2@114.984,90.551 Q3.2 R7.2 R42.2 U6.1 VD3.1 X5.2 | length 31.7
  Top Layer w1: Q3.2@83.566,114.266 pad.1@85.344,114.266 ; C8.1@86.712,92.788 R42.2 R7.2 ; VD3.1 105.519,113.683 106.807,112.395 109.093,112.395 C3.2
  Top Layer w1.5: X5.2 pad.2@114.984,90.551 ; pad.2@115.037,90.551 U6.1
  Bottom Layer w2: 107.493,41.704 108.665,40.469
GND_VDD: C10.1 C11.1 C12.1 C13.1 C21.1 C22.1 C25.1 C26.1 C27.1 GS.2 LCD1.1 LCD1.5 pad.0@48.641,67.818 pad.2@30.099,98.044 pad.8@52.959,98.552 pad.9@68.453,96.012 pad.@50.839,85.423 pad.@72.263,111.252 Q4.2 R16.2 R27.1 R27.2 R28.1 SW1.2 SW2.2 SW3.2 SW4.2 SW5.2 SW6.2 U2.23 U2.35 U2.47 U3.1 U4.4 U4.7 VD9.2 VD10.1 VD11.1 X1.3 X2.2 | length 150.6
  Top Layer w0.254: 51.22,86.265 U2.47 ; 54.991,94.361 55.32,94.032 U2.35 ; U2.23 63.094,90.765
  Top Layer w0.5: C22.1 40.972,71.325 42.418,72.771 44.45,72.771 ; U4.7 44.45,72.771 ; C13.1@46.648,85.726 49.061,85.726 50.761,85.726 51.22,86.185 ; U4.4 46.99,71.501 45.985,72.506 44.715,72.506 44.45,72.771 ; C25.1 52.959,96.393 54.991,94.361 ; 63.094,90.765 64.222,90.765 66.294,92.837 C26.1@66.597,92.837 ; 70.485,100.076 74.506,100.076 Q4.2@76.827,102.397
  Top Layer w1: R28.1 30.099,99.011 30.099,98.044 30.861,97.282 C21.1 ; X2.2 35.814,117.602 36.957,118.745 71.12,118.745 72.263,117.602 72.263,111.252 pad.@72.263,111.125 ; R27.1@41.783,114.808 41.529,115.062 41.529,114.427 R27.2 44.196,118.618 ; U4.4@47.18,69.278 48.641,67.818 56.261,67.818 61.087,72.644 C12.1@61.087,73.357 ; 51.882,67.818 C11.1 C10.1 ; C25.1 pad.8@52.959,98.298 ; 55.118,118.618 X1.3 55.118,114.787 56.03,113.951 VD11.1@58.928,113.951 ; C26.1@66.597,92.837 C26.1 66.9,93.013 68.453,93.013 ; VD9.2 72.26,114.043 ; 70.485,100.076 68.453,98.044 68.453,96.012 68.453,93.013 ; R16.2@72.517,93.013 68.453,93.013
  Top Layer w1.5: pad.2@30.099,98.044 30.099,93.638 U3.1
  Bottom Layer w1: GS.2@108.043,38.515 GS.2@108.077,38.515
GND_VDDA: C2.1 C5.2 C9.1 C15.2 C16.1 C18.1 C20.1 C28.1 GS.4 pad.0@77.597,69.977 pad.0@89.154,86.741 pad.1@97.663,70.612 pad.2@115.062,64.516 pad.3@114.554,50.038 R19.1 U1.4 U2.8 U5.1 X6.2 | length 69.4
  Top Layer w0.254: U2.8 58.32,82.269 58.674,81.915
  Top Layer w0.5: 58.674,81.915 63.246,77.343 63.246,74.93 64.819,73.357 C20.1 65.737,73.357 67.437,75.057 70.358,75.057
  Top Layer w1: 70.358,75.057 72.517,75.057 77.597,69.977 78.359,69.088 C2.1 ; C9.1 C15.2 85.725,85.852 86.614,86.741 89.154,86.741 91.567,86.741 92.886,85.422 R19.1 C16.1 ; U1.4@94.615,72.403 95.872,72.403 99.441,68.834 C5.2 ; C28.1 114.935,64.389 X6.2@114.935,67.437 ; pad.3@114.554,50.038 115.189,50.673 115.189,52.945 U5.1@114.935,53.199
I_TX: C8.2 R8.1 U2.19 | length 27.5
  Top Layer w0.254: U2.19 64.515,88.771 65.151,88.138
  Top Layer w0.5: 65.151,88.138 70.993,88.138 71.501,87.63 72.136,87.63
  Top Layer w1: 72.136,87.63 74.295,87.63 79.502,92.837 C8.2 R8.1
NetBQ1_1: BQ1.1 C11.2 R15.1 | length 6.1
  Top Layer w1: C11.2 55.218,69.85 58.039,72.671 R15.1@58.039,73.357
NetBQ1_2: BQ1.2 C10.2 U2.5 | length 11.8
  Top Layer w0.254: 56.642,81.788 56.82,81.966 U2.5
  Top Layer w0.5: BQ1.2 55.245,80.391 56.515,81.661
  Top Layer w1: C10.2 53.882,74.703 BQ1.2
NetC1_1: C1.1 X6.1 | length 3.1
  Top Layer w1: C1.1@111.682,70.358 X6.1@114.808,70.358
NetC1_2: C1.2 R3.2 | length 2.4
  Top Layer w1: R3.2@105.713,70.358 C1.2@108.155,70.358
NetC2_2: C2.2 R1.2 R5.1 | length 20.5
  Top Layer w1: R1.2@82.98,73.152 C2.2 82.98,63.451 84.201,62.23 90.473,62.23 R5.1
NetC5_1: C5.1 R6.2 | length 3.3
  Top Layer w1: R6.2 C5.1
NetC7_1: C7.1 R9.2 R13.1 U1.1 | length 19.2
  Top Layer w0.5: R13.1@82.98,76.786 R13.1 ; R9.2 88.773,68.072 90.551,69.85 U1.1 89.903,71.755
  Top Layer w1: R13.1@82.98,76.786 88.011,71.755 89.903,71.755 ; C7.1 R9.2
NetC7_2: C7.2 R5.2 R6.1 R9.1 U1.2 | length 17.3
  Top Layer w0.5: R9.1 R9.1@89.056,64.213 ; U1.2 91.821,68.248 R5.2 R6.1
  Top Layer w1: C7.2 R9.1 ; R9.1@89.056,64.213 R5.2
NetC12_2: C12.2 U2.7 | length 9.1
  Top Layer w0.254: U2.7 57.82,81.372 58.102,81.09
  Top Layer w0.5: 58.102,81.09 60.833,78.359 60.833,77.011 C12.2@61.087,76.757
NetC16_2: C16.2 R18.1 R19.2 U1.5 | length 12
  Top Layer w0.5: R19.2@92.554,80.723 R19.2
  Top Layer w1: R18.1 R19.2@92.554,80.723 ; R19.2 C16.2 95.885,78.727 U1.5@94.558,77.4
NetC19_2: C19.2 pad.1@64.516,80.645 pad.2@64.516,68.961 R20.2 R21.2 U2.11 | length 84.9
  Top Layer w0.254: U2.11 59.82,83.436 60.198,83.058
  Top Layer w0.5: 60.198,83.058 62.611,80.645 pad.1@64.516,80.645
  Top Layer w1: pad.2@64.516,68.961 80.137,53.34 80.137,37.846 88.822,29.161 C19.2 R21.2 R20.2
  Bottom Layer w1: pad.2@64.516,68.961 pad.1@64.516,80.645
NetC30_2: C30.2 U7.3 | length 3.4
  Top Layer w0.5: U7.3 42.672,61.595 43.737,62.66 C30.2@44.577,62.66
NetC31_1: C31.1 U2.14 | length 9.5
  Top Layer w0.254: U2.14 62.706,86.265 63.119,85.852
  Top Layer w0.5: 63.119,85.852 64.262,84.709 68.072,84.709 68.961,83.82 C31.1
NetC31_2: C31.2 R29.1 | length 2.2
  Top Layer w1: R29.1 C31.2@68.961,78.945
NetC32_2: C32.2 U7.2 | length 7.2
  Top Layer w0.5: U7.2 42.926,60.325 43.688,61.087 46.355,61.087 47.371,62.103 C32.2
NetC35*_1: C35*.2 X5.1 | length 5.5
  Top Layer w1.5: C35*.2 112.477,81.313 X5.1
NetC35*_2: C35*.1 R2-1.1 R2-2.1 R2-3.1 R2-4.1 R2-5.1 | length 18.7
  Top Layer w1.5: R2-1.1@105.731,82.55 R2-2.1 R2-3.1 105.731,91.313 ; R2-5.1@105.731,96.52 R2-4.1 105.731,91.313 ; C35*.1 105.731,91.313
NetK1_2: K1.2 R30.1 | length 8.9
  Top Layer w0.5: R30.1 29.923,110.744 34.925,110.744 35.814,111.633 K1.2
NetLCD1_3: LCD1.3 R27.3 | length 7.3
  Bottom Layer w1: LCD1.3 45.295,109.684 46.736,111.125 R27.3
NetLCD1_4: LCD1.4 pad.@47.117,98.552 U2.39 | length 22
  Top Layer w0.254: 50.609,90.614 50.959,90.265 U2.39
  Top Layer w0.5: pad.@47.117,98.552 49.276,96.393 49.276,91.948 50.609,90.614
  Bottom Layer w1: pad.@47.117,98.552 47.835,99.27 LCD1.4
NetLCD1_6: LCD1.6 pad.@49.53,98.552 U2.38 | length 21.2
  Top Layer w0.254: 51.436,91.06 51.732,90.765 U2.38
  Top Layer w0.5: pad.@49.53,98.552 50.292,97.79 50.292,92.205 51.436,91.06
  Bottom Layer w1: pad.@49.53,98.552 49.53,100.838 52.915,104.223 LCD1.6
NetLCD1_11: LCD1.11 pad.11 U2.28 | length 18.1
  Top Layer w0.254: U2.28 58.82,95.015 59.055,95.25
  Top Layer w0.5: 59.055,95.25 65.659,101.854 pad.11
  Bottom Layer w1: pad.11@65.615,105.454 LCD1.11
NetLCD1_12: LCD1.12 pad.10 U2.27 | length 18.9
  Top Layer w0.254: U2.27 59.32,94.118 59.69,94.488
  Top Layer w0.5: 59.69,94.488 68.199,102.997 pad.10
  Bottom Layer w1: pad.10@68.155,105.454 LCD1.12
NetLCD1_13: LCD1.13 pad.9@70.739,105.41 U2.26 | length 19.7
  Top Layer w0.254: U2.26 59.82,93.475 60.325,93.98
  Top Layer w0.5: 60.567,93.965 70.739,104.137 pad.9@70.739,105.41
  Bottom Layer w1: pad.9@70.695,105.454 LCD1.13
NetLCD1_14: LCD1.14 pad.8@73.279,105.41 U2.25 | length 20.8
  Top Layer w0.254: U2.25 U2.25@60.32,92.781
  Top Layer w0.5: 60.452,93.065 60.94,93.065 pad.8@73.279,105.404 ; pad.8@73.279,105.156 pad.8@73.279,105.404 ; pad.8@73.279,105.41 pad.8@73.279,105.404
  Bottom Layer w1: pad.8@73.235,105.454 LCD1.14
NetLCD1_15: LCD1.15 pad.7@75.819,111.252 R31.2 | length 5.7
  Top Layer w1: pad.7@75.819,111.252 R31.2
  Bottom Layer w1: LCD1.15@75.819,107.867 pad.7@75.819,111.252
NetLCD1_16: LCD1.16 pad.@78.315,105.41 Q4.3 | length 5.3
  Top Layer w0.5: Q4.3 76.674,105.41 pad.@78.315,105.41
  Bottom Layer w1: pad.@78.315,105.41 LCD1.16
NetQ1_1: Q1.1 R7.1 R8.2 R42.1 | length 22.4
  Top Layer w1: R8.2@86.839,96.188 R42.1 R7.1 101.219,100.252 101.219,104.648 100.457,105.41 99.568,105.41
NetQ1_2: J2.1 Q1.2 R11.2 VD5.1 | length 13.7
  Top Layer w0.8: J2.1@94.029,107.569 94.029,106.504 96.393,104.14 97.536,104.14
  Top Layer w1: J2.1@90.756,107.569 90.756,103.932 R11.2@93.977,100.711
NetQ1_4: Q1.4 R10.2 VD4.2 | length 22.2
  Top Layer w0.5: R10.2@83.263,99.871 R10.2@83.263,100.711
  Top Layer w1: R10.2@83.026,100.711 VD4.2@83.026,104.775 ; R10.2@83.263,99.871 84.836,98.298 95.758,98.298 98.494,101.034 Q1.4@98.494,101.346
NetQ1_5: Q1.5 Q1.6 Q1.7 Q1.8 R2-1.2 R2-2.2 R2-3.2 R2-4.2 R2-5.2 VD2.1 VD3.2 | length 32.2
  Top Layer w1: VD2.1@99.568,109.583 VD3.2
  Top Layer w1.5: R2-1.2@102.331,82.55 R2-2.2 R2-3.2 R2-4.2 102.331,97.251 104.013,98.933 VD3.2
NetQ2_1: Q2.1 Q3.3 R14.1 VD6.2 | length 21.4
  Top Layer w0.5: VD6.2@82.997,107.286 Q2.1 82.997,112.207 83.439,112.649 86.106,112.649 87.249,113.792 87.249,116.366 ; 89.501,116.366 89.662,116.205 R14.1 R14.1@90.341,116.366
  Top Layer w1: Q3.3@82.677,116.366 R14.1@90.341,116.366
NetQ2_2: Q2.2 R10.1 R11.1 R12.1 VD4.1 VD5.2 VD6.1 | length 22.1
  Top Layer w0.5: R12.1@90.297,111.887 R12.1
  Top Layer w1: Q2.2@85.09,109.059 87.469,109.059 R12.1@90.297,111.887 ; 85.979,109.059 85.979,103.886 ; VD5.2 85.979,103.886 ; R11.1 R10.1 86.409,103.456 85.979,103.886
NetQ3_1: Q3.1 R17.1 | length 17.4
  Top Layer w1: R17.1@76.606,98.577 81.153,103.124 81.153,114.046
NetQ4_1: Q4.1 R35.2 | length 2.6
  Top Layer w0.5: R35.2@72.517,101.854 72.771,102.108 74.522,102.108 Q4.1
NetR3_1: R3.1 R4.1 U1.3 VD1.1 | length 18.7
  Top Layer w0.5: VD1.1 92.234,74.771 92.71,74.295 93.091,74.295 ; U1.3 93.091,74.295 ; R4.1 97.204,73.23 96.139,74.295 93.091,74.295 ; R3.1@101.805,70.358 R3.1
  Top Layer w1: R4.1 R3.1@101.805,70.358
NetR15_2: R15.2 U2.6 | length 8
  Top Layer w0.254: 57.32,80.688 U2.6
  Top Layer w0.5: 57.277,80.645 57.277,77.519 R15.2@58.039,76.757
NetR16_1: R16.1 U2.20 | length 11
  Top Layer w0.254: U2.20 65.614,89.265 65.835,89.486
  Top Layer w0.5: 65.835,89.486 R16.1
NetR22_2: R22.2 U2.3 U4.6 | length 24
  Top Layer w0.254: 55.562,82.105 55.82,82.363 U2.3
  Top Layer w0.5: R22.2@42.467,79.502 43.18,79.502 45.72,76.962 U4.6 45.72,74.041 46.355,73.406 47.879,73.406 49.348,74.875 49.348,75.891 55.562,82.105
NetR23_1: R23.1 U2.2 U4.5 | length 12.9
  Top Layer w0.254: 54.864,82.804 55.32,83.26 U2.2
  Top Layer w0.5: R23.1@50.214,78.722 50.214,79.502 51.562,79.502 54.864,82.804
  Top Layer w1: U4.5@47.214,75.722 R23.1@50.214,78.722
NetR25_1: R25.1 VD9.1 | length 3.7
  Top Layer w1: R25.1 VD9.1@69.977,117.016
NetR25_2: pad.2@57.531,98.552 pad.4 R25.2 U2.33 | length 25.1
  Top Layer w0.254: U2.33 56.32,95.373 56.451,95.504
  Top Layer w0.5: 56.451,95.504 56.451,97.091 57.531,98.171 pad.2@57.531,98.552
  Top Layer w1: pad.4@62.865,107.733 62.865,109.093 66.294,112.522 R25.2
  Bottom Layer w1: pad.2@57.531,98.679 57.531,99.574 62.865,104.908 pad.4@62.865,107.733
NetR28_2: R28.2 R30.2 U2.44 | length 40.7
  Top Layer w0.254: 46.432,88.188 46.847,87.773 ; 46.847,87.765 U2.44
  Top Layer w0.5: R28.2@28.702,103.632 29.464,102.87 38.586,102.87 39.497,101.959 39.497,90.805 40.132,90.17 44.45,90.17 46.616,88.004
  Top Layer w1: R28.2@28.956,103.886 R30.2
NetR29_2: R29.2 R32.1 U7.4 | length 33.4
  Top Layer w1: R32.1 41.589,64.759 U7.4@41.589,63.119 ; 41.451,65.532 57.658,65.532 63.373,71.247 67.486,71.247 R29.2@68.961,72.722
NetR32_2: R32.2 R38.1 U7.5 | length 8.1
  Top Layer w1: R38.1 37.289,65.962 R32.2 36.389,64.759 U7.5@36.389,63.119
NetR33_1: J1.1 R33.1 U2.31 | length 22.7
  Top Layer w0.254: U2.31 57.32,96.139
  Top Layer w0.5: J1.1@53.008,100.838 57.658,100.838 59.309,99.187 59.309,98.171 57.404,96.266
  Top Layer w1: R33.1 J1.1@49.608,100.838
NetR33_2: R33.2 X2.1 | length 30.2
  Top Layer w0.5: X2.1 31.242,116.713 25.908,111.379 25.908,102.743 27.051,101.6 37.035,101.6 R33.2@37.328,101.307
NetR34_1: R34.1 U2.30 | length 18.1
  Top Layer w0.254: U2.30 57.82,95.288 58.097,95.565
  Top Layer w0.5: R34.1 53.516,103.505 57.912,103.505 60.325,101.092 60.325,97.793 58.097,95.565
NetR34_2: R34.2 X2.3 | length 41.1
  Top Layer w0.5: X2.3 36.449,114.808 30.861,114.808 27.051,110.998 27.051,108.839 27.686,108.204 29.845,108.204 30.988,107.061 30.988,105.664 32.639,104.013 R34.2@49.481,104.013
NetR35_1: pad.0@71.882,95.758 pad.1@66.294,83.058 R35.1 U2.12 | length 23.6
  Top Layer w0.5: 60.452,84.201 60.684,84.201 62.862,84.201 63,84.063 63.003,84.063 64.008,83.058 pad.1@66.294,83.058
  Top Layer w1: pad.0@71.882,95.758 72.517,96.393 R35.1@72.517,97.741
  Bottom Layer w1: pad.1@66.294,83.058 66.294,89.535 71.882,95.123 pad.0@71.882,95.758
NetR36_1: R36.1 U2.37 VD10.2 | length 28.2
  Top Layer w0.254: 52.31,91.553 52.598,91.265 U2.37
  Top Layer w0.5: 52.31,91.553 51.308,92.555 51.308,105.41 52.07,106.172 54.737,106.172
  Top Layer w1: R36.1@52.578,110.998 VD10.2@56.388,110.998 ; 54.737,106.172 56.642,108.077 56.642,110.363
NetR36_2: R36.2 X1.2 | length 2.2
  Top Layer w1: R36.2 X1.2
NetR37_1: pad.1@55.245,98.552 pad.3@59.182,107.823 R37.1 U2.34 VD11.2 | length 25.1
  Top Layer w0.254: 55.499,95.25 55.82,94.929 U2.34
  Top Layer w0.5: pad.1@55.245,98.552 55.245,95.504 55.499,95.25 ; pad.3@59.182,107.823 VD11.2
  Top Layer w1: VD11.2@59.436,111.633 61.263,111.633 62.357,112.727 R37.1
  Bottom Layer w1: pad.1@55.245,98.552 55.245,101.092 59.182,105.029 pad.3@59.182,107.823
NetR37_2: R37.2 X1.4 | length 5.3
  Top Layer w1: X1.4 57.658,116.39 58.284,117.016 R37.2
NetR38_2: HCM1206a.1 pad.3@37.54,49.443 R38.2 X4.1 | length 28.8
  Top Layer w0.5: X4.1 X4.1@29.464,58.547
  Top Layer w1: R38.2@32.258,62.689 31.574,62.689 29.21,60.325 X4.1 30.48,57.277 34.671,57.277 35.941,56.007 35.941,51.054 pad.3@37.592,49.403
  Bottom Layer w1: HCM1206a.1 pad.3@37.54,49.443
NetR39_1: R39.1 U7.8 | length 2.8
  Top Layer w0.5: R39.1@32.131,58.977 R39.1
  Top Layer w1: R39.1 32.59,59.055 34.925,59.055
NetR39_2: HCM1206a.2 pad.2@32.255,49.443 R39.2 X4.2 | length 17.9
  Top Layer w1: X4.2@28.956,56.007 29.386,55.577 32.255,55.577 pad.2@32.255,49.403
  Bottom Layer w1: HCM1206a.2@31.184,41.598 31.184,41.852 32.255,42.923 pad.2@32.255,49.403
SIN_C: R1.1 U2.15 | length 24.8
  Top Layer w0.254: U2.15 63.627,86.765
  Top Layer w0.5: 63.627,86.765 64.54,85.852 68.961,85.852 69.342,85.471
  Top Layer w1: 69.342,85.471 73.66,81.153 73.66,79.072 R1.1@79.58,73.152
TX: R17.2 U2.21 | length 18.4
  Top Layer w0.254: U2.21 64.619,89.765 64.897,90.043
  Top Layer w0.5: 64.897,90.043 65.913,91.059 74.549,91.059
  Top Layer w1: 74.549,91.059 76.708,93.218 R17.2
U_RX: C9.2 R13.2 U2.17 | length 24.6
  Top Layer w0.254: U2.17 63.627,87.765
  Top Layer w0.5: 63.627,87.757 64.008,87.757 64.77,86.995 70.231,86.995 70.485,86.741 ; C9.2@79.58,80.674 C9.2
  Top Layer w1: 70.485,86.741 70.739,86.741 76.757,80.723 C9.2 ; R13.2 C9.2@79.58,80.674
VDD: C13.2 C21.2 C22.2 C25.2 C26.2 C27.2 K1.3 LCD1.2 pad.7@37.211,95.123 pad.@41.656,110.109 R22.1 R23.2 U2.1 U2.24 U2.36 U2.48 U3.2 U3.4 U4.8 X1.1 | length 101.4
  Top Layer w0.254: U2.48 54.681,85.765 55.03,86.114 ; U2.1 54.82,85.65 ; U2.36@54.82,92.246 54.82,91.277 55.284,90.813 ; 59.856,90.813 60.308,91.265 U2.24 62.309,91.265 62.689,91.645
  Top Layer w0.5: C25.2 53.937,93.423 54.396,92.964 54.61,92.964 ; 62.689,91.645 63.324,92.28 C26.2
  Top Layer w0.7: C27.2@48.426,82.326 49.061,82.326 51.338,82.326 55.245,86.233
  Top Layer w1: U3.2 U3.4 C21.2@37.186,97.229 ; U3.4@37.219,90.551 36.83,90.162 36.83,85.979 38.735,84.074 43.663,84.074 45.411,82.326 ; K1.3 38.989,112.268 41.656,112.268 ; R22.1@39.067,79.502 39.067,75.536 C22.2 40.651,75.498 U4.8@42.926,75.498 ; R22.1@39.067,79.756 39.067,84.074 ; pad.@41.656,110.109 41.656,112.268 ; C13.2@46.648,82.326 45.411,82.326 ; R23.2@46.814,79.502 45.411,80.905 45.411,82.326 ; C13.2@46.98,82.326 C27.2@48.426,82.326 ; X1.1 50.038,114.681 47.625,112.268 41.656,112.268
  Bottom Layer w1: pad.7@37.211,94.615 37.211,98.806 42.755,104.35 LCD1.2 42.755,109.01 pad.@41.656,110.109
VDDA: C15.1 C18.2 C20.2 C28.2 R18.2 U1.8 U2.9 U5.2 U5.4 VD1.2 | length 137.2
  Top Layer w0.254: U2.9 58.82,83.035 59.168,82.687
  Top Layer w0.5: 59.168,82.687 59.231,82.624 59.237,82.624 62.804,79.057 65.722,79.057 67.564,80.899 70.358,80.899 71.96,79.297 71.96,78.281 78.994,71.247 80.645,71.247 81.28,71.882 81.28,79.326 ; C20.2 65.405,79.057
  Top Layer w1: 81.28,79.326 C18.2 ; 87.503,80.518 VD1.2 U1.8@90.297,77.121 ; R18.2 C18.2 ; C28.2 104.394,64.389 104.14,64.135 ; U5.4@109.372,55.499 110.49,56.617 ; 110.49,54.585 110.49,57.785 104.14,64.135 ; C18.2 80.977,82.423 78.232,82.423 77.216,83.439 77.216,86.233 79.756,88.773 97.282,88.773 99.441,86.614 99.441,81.28 104.14,76.581 104.14,64.135
  Top Layer w1.5: U5.4@109.372,55.499 U5.2
ZERO: R4.2 U1.6 U1.7 | length 9.2
  Top Layer w0.5: U1.7 U1.6 93.091,75.946 93.726,75.311 96.012,75.311 97.331,76.63 R4.2
pads on no net: K1.1 U2.4 U2.10 U2.13 U2.16 U2.18 U2.22 U2.29 U2.32 U4.1 U4.2 U4.3

## Polygon pours and split planes (outlines as drawn)
GND_5V on Bottom Layer "GND_5V" (solid, remove dead copper, pour order 12): 116.459,38.989 70.231,38.989 70.231,96.52 74.93,101.219 76.835,101.219 80.391,104.775 80.391,119.634 81.28,120.523 109.982,120.523 116.459,114.046
GND_VDD on Bottom Layer "GND_VDD" (solid, remove dead copper, pour order 9): 30.988,120.523 79.883,120.523 80.391,120.015 80.391,104.775 76.758,101.142 74.472,101.142 73.787,100.457 73.787,92.583 70.485,89.281 70.485,65.786 63.754,65.786 48.26,65.786 45.593,68.453 45.593,72.114 28.067,85.068 28.067,86.233 28.067,113.665 30.988,116.586
GND_VDD on Bottom Layer "GND_BUTTONS" (solid, remove dead copper, pour order 8): 57.436,66.802 70.485,66.802 80.772,56.515 87.249,56.515 97.06,56.515 103.255,50.32 103.255,43.938 109.01,38.183 107.91,37.084 88.773,37.084 88.011,36.322 88.011,34.004 86.646,32.639 73.311,32.639 56.166,32.639 42.831,32.639 41.561,33.909 41.561,57.308 41.561,66.802
GND on Bottom Layer "common" (solid, remove dead copper, pour order 13): 24.257,120.523 120.269,120.523 120.269,24.511 24.257,24.511
GND_VDDA on Bottom Layer "GND_VDDA" (solid, remove dead copper, pour order 11): 79.624,90.17 99.06,90.17 100.713,88.517 100.713,81.783 103.121,79.375 116.459,79.375 116.459,65.024 116.459,46.566 110.701,46.566 110.109,45.975 110.109,44.355 111.771,41.832 111.887,41.656 111.706,41.549 110.294,40.717 107.569,43.711 107.567,46.566 107.569,50.419 107.569,53.594 99.568,61.595 83.468,61.595 76.278,68.746 76.18,86.707

## Other copper
Top Layer:
  rectangle net VDD: 54.903,85.848 60.237,91.182
  region net +5V: 113.538,96.393 109.093,96.393 107.696,97.79 107.696,101.6 109.22,103.124 113.538,103.124
  region net VDD: 32.512,93.853 36.957,93.853 38.354,92.456 38.354,88.646 36.83,87.122 32.512,87.122
  region net VDDA: 113.538,52.197 109.093,52.197 107.696,53.594 107.696,57.404 109.22,58.928 113.538,58.928
Bottom Layer:
  text "RX  G  TX" at 40.005,118.71 h2
  text "SWD" at 55.88,118.71 h2
  text "VDD" at 49.403,111.506 h1.6 r270
  text "GND" at 54.61,111.379 h1.8 r270
  text "SWDIO" at 57.277,110.109 h1.6 r270
  text "SWCLK" at 52.07,109.728 h1.6 r270
  text "TX" at 111.125,83.439 h3 r270
  text "RX" at 111.125,66.929 h3 r270
  text "SOUND" at 27.94,44.323 h3 r270
  text "+Up-" at 117.348,35.433 h3 r270
  text "Quasar ARM   v1.0" at 89.027,27.94 h4

## Silkscreen, mask and mechanical layers (free items; w line width, h text height)
Mechanical 13:
  circle w0.254: c69.369,56.167 r2
  circle w0.254: c69.369,35.667 r2
  lines w0.254: 31.369,25.667 31.369,66.167 107.369,66.167 107.369,25.667 31.369,25.667

## Text inside footprints (layer, text, board x,y; h text height)
HCM1206a: Top Overlay "+" at 39.776,42.48 h1.52 r180